# Altium PCB arduino_Uno_Rev3-02-TH_2022-03-31.pcbdoc (part 1 of 2)
Units mil, origin at the board's own origin, x right, y up, seen from the top; angles counter-clockwise.
Board outline 5460.48 x 4115 mil, 2 copper layers (Top Layer, Bottom Layer); 53 components, 61 nets, 247 pads, 72 vias.
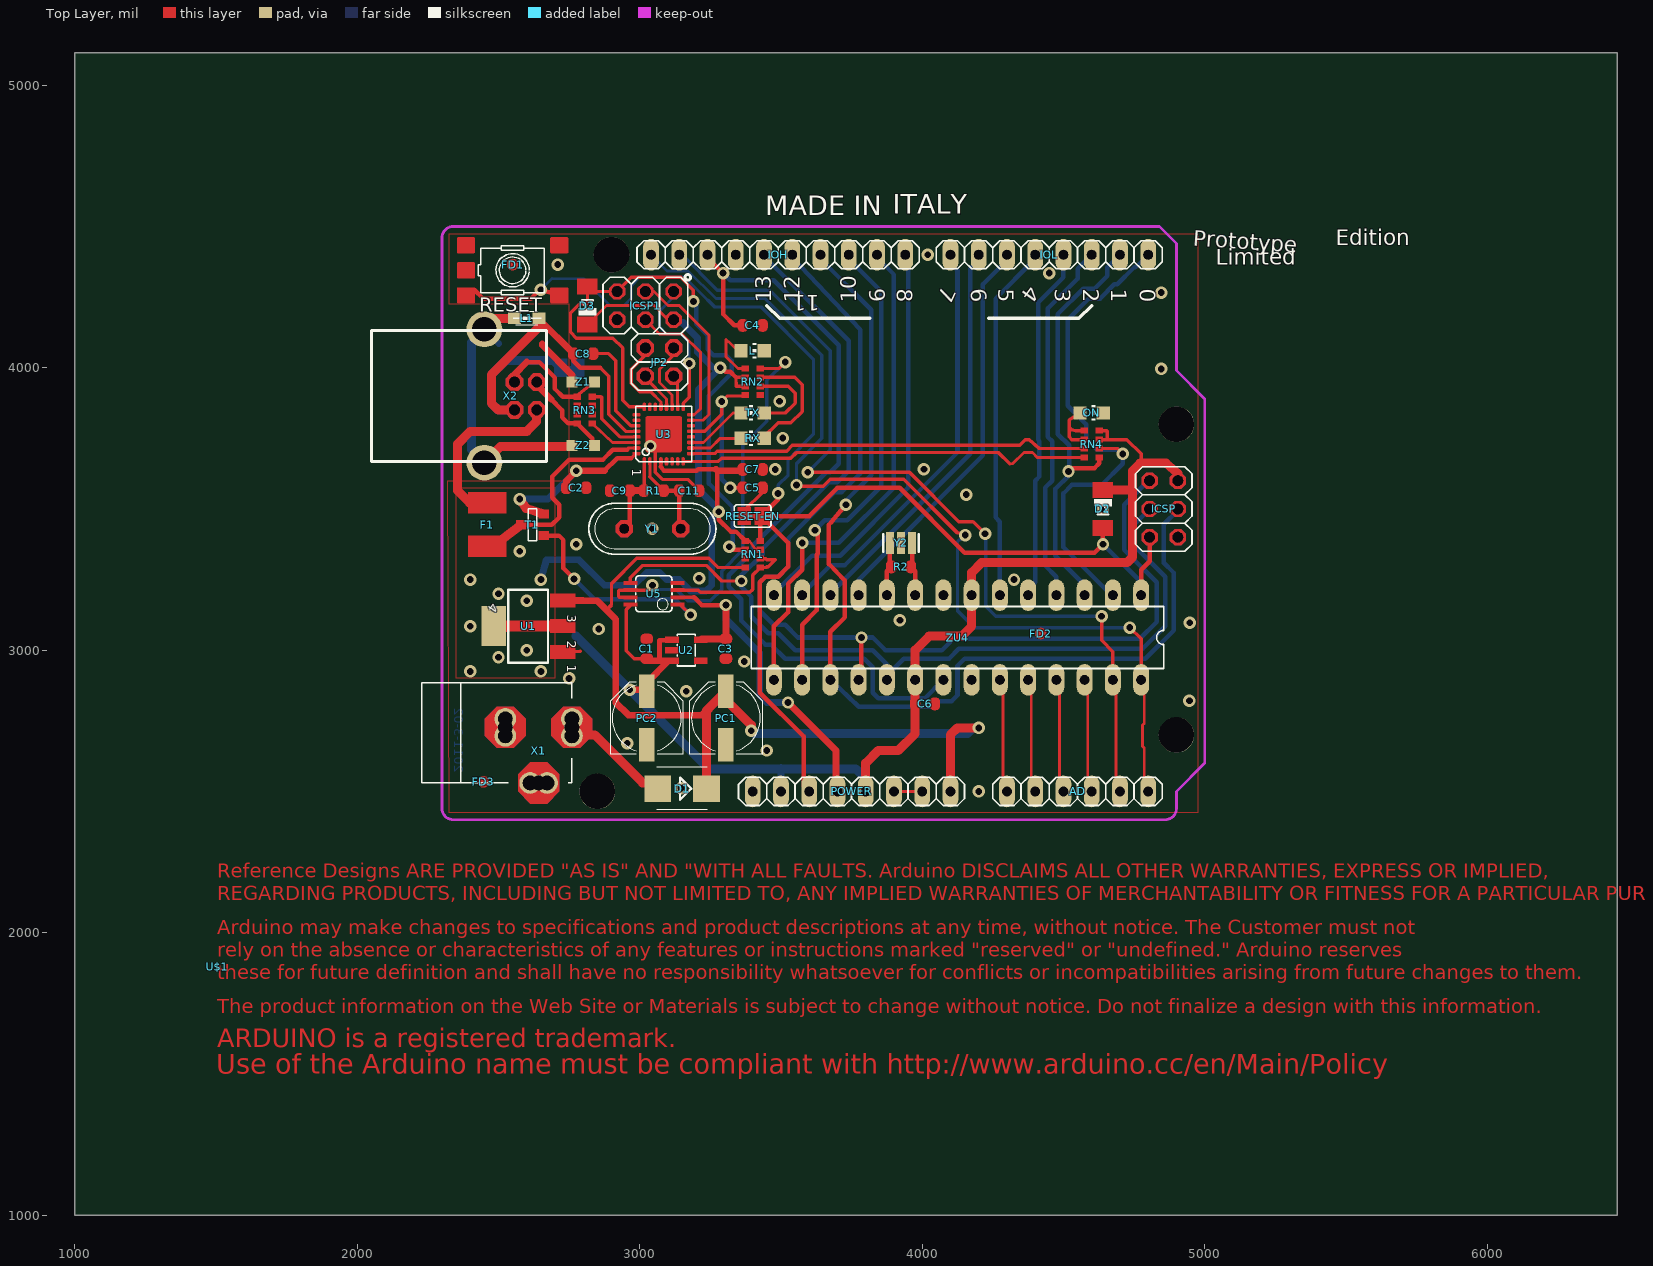
[diagram p0: Top Layer view]
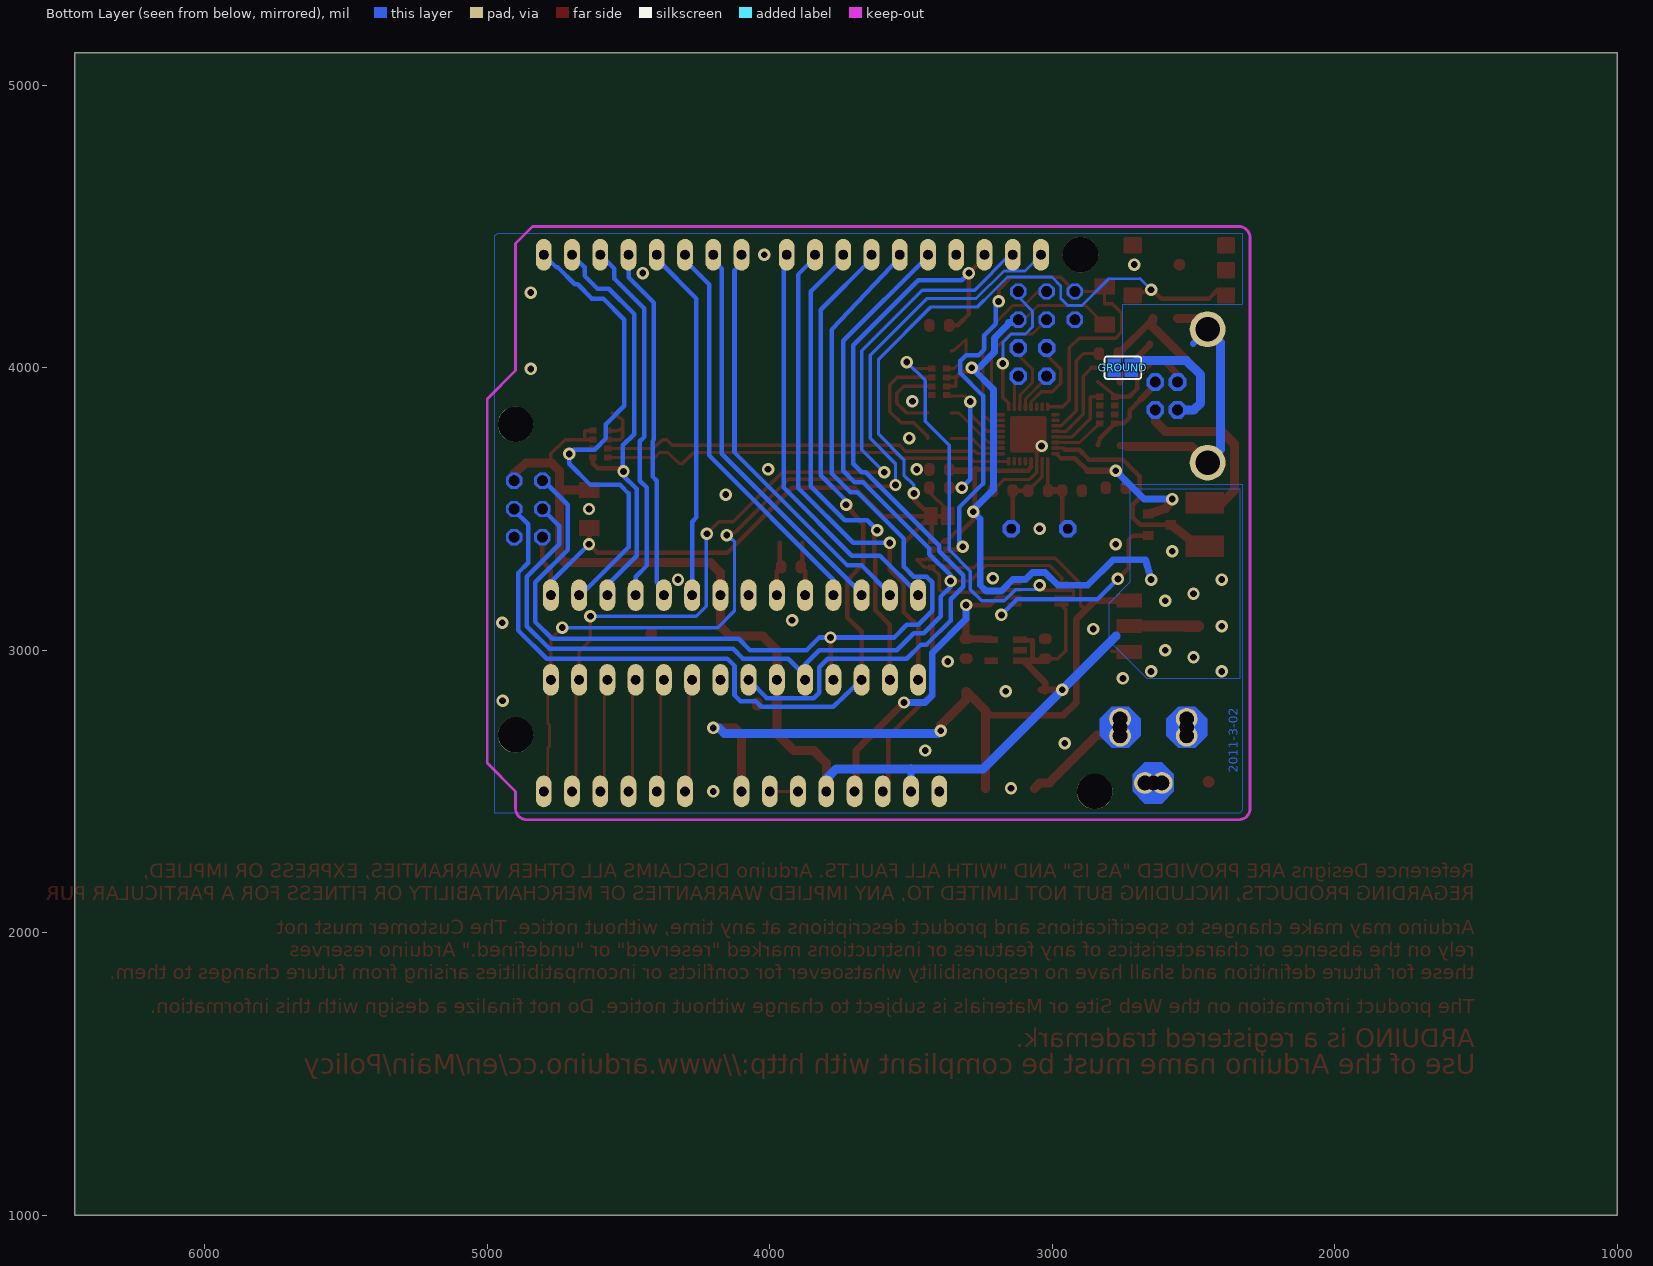
[diagram p1: Bottom Layer view, seen from below]

## Layer stack, top to bottom
Top Layer: signal copper (thickness not stored)
Dielectric: dielectric 12.6, FR-4, Dk 4.8
Bottom Layer: signal copper (thickness not stored)

## Board outline
6460.48,1000 1000,1000 1000,5115 6460.48,5115

## Components (designator, comment, footprint, x,y, rotation, side; value= is the part's Value field where it differs from the comment)
AD "6x1F-H8.5" 1X06 4550,2500 r0 top
C1 "100n" C0603-ROUND 3025,3005 r270 top
C2 "100n" C0603-ROUND 2775,3575 r180 top
C3 "1u" C0603-ROUND 3305,3005 r90 top
C4 "100n" C0603-ROUND 3400,4150 r180 top
C5 "100n" C0603-ROUND 3400,3575 r0 top
C6 "100n" C0603-ROUND 4010,2810 r180 top
C7 "100n" C0603-ROUND 3400,3640 r0 top
C8 "1u" C0603-ROUND 2800,4050 r180 top
C9 "22p" C0603-ROUND 2930,3565 r180 top
C11 "22p" C0603-ROUND 3175,3565 r0 top
D1 "M7" SMB 3150,2510 r180 top
D2 "CD1206-S01575" MINIMELF 4640,3500 r270 top
D3 "CD1206-S01575" MINIMELF 2815,4220 r90 top
F1 "MF-MSMF050-2 500mA" L1812 2460,3445 r90 top
FD1 "FIDUCIALMOUNT" FIDUCIA-MOUNT 2550,4365 r0 top
FD2 "FIDUCIALMOUNT" FIDUCIA-MOUNT 4419.68,3059.09 r0 top
FD3 "FIDUCIALMOUNT" FIDUCIA-MOUNT 2446.85,2534.25 r0 top
GROUND "_" SJ 2750,4000 r180 bottom
ICSP "3x2 M" 2X03 4854.99,3500 r270 top
ICSP1 "3x2 M" 2X03 3020,4220 r180 top
IOH "10x1F-H8.5" 1X10 3490,4400 r180 top
IOL "8x1F-H8.5" 1X08 4450,4400 r180 top
JP2 "2x2 M - NM" 2X02 3070,4020 r90 top
L "YELLOW" CHIP-LED0805 3400,4060 r270 top
L1 "BLM21" 0805 2600,4175 r180 top
ON "GREEN" CHIP-LED0805 4600,3840 r270 top
PC1 "47u" PANASONIC_D 3305,2760 r90 top
PC2 "47u" PANASONIC_D 3025,2760 r90 top
POWER "8x1F-H8.5" 1X08 3750,2500 r0 top
R1 "1M" R0603-ROUND 3050,3565 r0 top
R2 "1M" R0603-ROUND 3925,3295 r180 top
RESET "TS42031-160R-TR-7260" TS42 2550,4345 r0 top
RESET-EN "_" SJ 3400,3475 r0 top
RN1 "10K" CAY16 3400,3340 r90 top
RN2 "1K" CAY16 3400,3950 r270 top
RN3 "22R" CAY16 2805,3850 r90 top
RN4 "1K" CAY16 4600,3730 r90 top
RX "YELLOW" CHIP-LED0805 3400,3750 r90 top
T1 "FDN340P" SOT-23 2620,3445 r270 top
TX "YELLOW" CHIP-LED0805 3400,3840 r90 top
U1 "NCP1117ST50T3G" SOT223 2605,3085 r90 top
U2 "LP2985-33DBVR" SOT23-DBV 3165,3000 r270 top
U3 "ATMEGA16U2-MU(R)" MLF32 3085,3765 r90 top
U5 "LMV358IDGKR" MSOP08 3050,3200 r90 top
U$1 "DISCLAIMER" DISCLAIMER 1505,1880 r0 top
X1 "POWERSUPPLY_DC21MMX" POWERSUPPLY_DC-21MM 2510,2730 r90 top
X2 "USB-B_TH" PN61729 2450,3900 r270 top
Y1 "16MHz" QS 3045,3430 r180 top
Y2 "CSTCE16M0V53-R0 16MHZ" RESONATOR 3925,3380 r0 top
Z1 "CG0603MLC-05E" CT/CN0603 2800,3950 r180 top
Z2 "CG0603MLC-05E" CT/CN0603 2800,3725 r180 top
ZU4 "ATMEGA328P-PU" DIL28-3 4125,3045 r180 top

## Footprints (in the part's own frame and the unit in brackets; to place one, negate y for a bottom-side part, rotate by r counter-clockwise, add the part's x,y. Pads: shape width x height; smd on the part's side, far side on the other; paste and mask are expansions set on the pad)
1X06 [mil]
  oval 56x112 hole 33.46 slot 33.66 at 90 deg: 1(-250,0) 2(-150,0) 3(-50,0) 4(50,0) 5(150,0) 6(250,0)
  silkscreen extent -300,-50 300,50
1X08 [mil]
  oval 56x112 hole 33.46 slot 33.66 at 90 deg: 1(-350,0) 2(-250,0) 3(-150,0) 4(-50,0) 5(50,0) 6(150,0) 7(250,0) 8(350,0)
  silkscreen extent -400,-50 400,50
1X10 [mil]
  oval 56x112 hole 33.46 slot 33.66 at 90 deg: 1(-450,0) 2(-350,0) 3(-250,0) 4(-150,0) 5(-50,0) 6(50,0) 7(150,0) 8(250,0) 9(350,0) 10(450,0)
  silkscreen extent -500,-50 500,50
2X02 [mil]
  round 0 hole 37.4 slot 37.6 at 0 deg: 1(-50,-50) 2(-50,50) 3(50,-50) 4(50,50)
  Top Layer region: -19.5,-37.4 -37.4,-19.5 -62.6,-19.5 -80.5,-37.4 -80.5,-62.6 -62.6,-80.5 -37.4,-80.5 -19.5,-62.6
  Top Layer region: -19.5,62.6 -37.4,80.5 -62.6,80.5 -80.5,62.6 -80.5,37.4 -62.6,19.5 -37.4,19.5 -19.5,37.4
  Top Layer region: 80.5,-37.4 62.6,-19.5 37.4,-19.5 19.5,-37.4 19.5,-62.6 37.4,-80.5 62.6,-80.5 80.5,-62.6
  Top Layer region: 80.5,62.6 62.6,80.5 37.4,80.5 19.5,62.6 19.5,37.4 37.4,19.5 62.6,19.5 80.5,37.4
  Bottom Layer region: -19.5,-37.4 -37.4,-19.5 -62.6,-19.5 -80.5,-37.4 -80.5,-62.6 -62.6,-80.5 -37.4,-80.5 -19.5,-62.6
  Bottom Layer region: -19.5,62.6 -37.4,80.5 -62.6,80.5 -80.5,62.6 -80.5,37.4 -62.6,19.5 -37.4,19.5 -19.5,37.4
  Bottom Layer region: 80.5,-37.4 62.6,-19.5 37.4,-19.5 19.5,-37.4 19.5,-62.6 37.4,-80.5 62.6,-80.5 80.5,-62.6
  Bottom Layer region: 80.5,62.6 62.6,80.5 37.4,80.5 19.5,62.6 19.5,37.4 37.4,19.5 62.6,19.5 80.5,37.4
  silkscreen extent -100,-100 100,100
2X03 [mil]
  round 0 hole 37.4 slot 37.6 at 0 deg: 1(-100,-49.99) 2(-100,50.01) 3(0,-49.99) 4(0,50.01) 5(100,-49.99) 6(100,50.01)
  Top Layer region: -71.8,-38.29 -88.3,-21.79 -111.7,-21.79 -128.2,-38.29 -128.2,-61.69 -111.7,-78.19 -88.3,-78.19 -71.8,-61.69
  Top Layer region: -71.8,61.71 -88.3,78.21 -111.7,78.21 -128.2,61.71 -128.2,38.31 -111.7,21.81 -88.3,21.81 -71.8,38.31
  Top Layer region: 28.2,-38.29 11.7,-21.79 -11.7,-21.79 -28.2,-38.29 -28.2,-61.69 -11.7,-78.19 11.7,-78.19 28.2,-61.69
  Top Layer region: 28.2,61.71 11.7,78.21 -11.7,78.21 -28.2,61.71 -28.2,38.31 -11.7,21.81 11.7,21.81 28.2,38.31
  Top Layer region: 128.2,-38.29 111.7,-21.79 88.3,-21.79 71.8,-38.29 71.8,-61.69 88.3,-78.19 111.7,-78.19 128.2,-61.69
  Top Layer region: 128.2,61.71 111.7,78.21 88.3,78.21 71.8,61.71 71.8,38.31 88.3,21.81 111.7,21.81 128.2,38.31
  Bottom Layer region: -71.8,-38.29 -88.3,-21.79 -111.7,-21.79 -128.2,-38.29 -128.2,-61.69 -111.7,-78.19 -88.3,-78.19 -71.8,-61.69
  Bottom Layer region: -71.8,61.71 -88.3,78.21 -111.7,78.21 -128.2,61.71 -128.2,38.31 -111.7,21.81 -88.3,21.81 -71.8,38.31
  Bottom Layer region: 28.2,-38.29 11.7,-21.79 -11.7,-21.79 -28.2,-38.29 -28.2,-61.69 -11.7,-78.19 11.7,-78.19 28.2,-61.69
  Bottom Layer region: 28.2,61.71 11.7,78.21 -11.7,78.21 -28.2,61.71 -28.2,38.31 -11.7,21.81 11.7,21.81 28.2,38.31
  Bottom Layer region: 128.2,-38.29 111.7,-21.79 88.3,-21.79 71.8,-38.29 71.8,-61.69 88.3,-78.19 111.7,-78.19 128.2,-61.69
  Bottom Layer region: 128.2,61.71 111.7,78.21 88.3,78.21 71.8,61.71 71.8,38.31 88.3,21.81 111.7,21.81 128.2,38.31
  silkscreen extent -150,-100 150,100
0805 [mm]
  rect 1.2x1 smd: 1(-1.1,0) 2(1.1,0)
  silkscreen extent -1.3,-0.62 1.2,0.62
C0603-ROUND [mil]
  round 0 smd: 1(-35,0) 2(35,0)
  Top Layer region: -38.5,-21.6 -40.2,-21.5 -41.9,-21.2 -43.5,-20.7 -45.1,-20 -46.6,-19.1 -47.9,-18.1 -49.1,-16.9 -50.2,-15.5 -51.1,-14.1 -51.8,-12.5 -52.3,-10.9 -52.6,-9.2 -52.7,-7.5 -52.7,7.5 -52.6,9.2 -52.3,10.9 -51.8,12.5 -51.1,14.1 -50.2,15.5 -49.1,16.9 -47.9,18.1 -46.6,19.2 -45.1,20 -43.5,20.7 -41.9,21.2 -40.2,21.6 -38.5,21.7 -31.5,21.7 -29.8,21.6 -28.1,21.2 -26.4,20.7 -24.9,20 -23.4,19.2 -22.1,18.1 -20.9,16.9 -19.8,15.5 -18.9,14.1 -18.2,12.5 -17.7,10.9 -17.4,9.2 -17.3,7.5 -17.3,-7.5 -17.4,-9.2 -17.7,-10.9 -18.2,-12.5 -18.9,-14.1 -19.8,-15.5 -20.9,-16.9 -22.1,-18.1 -23.4,-19.1 -24.9,-20 -26.4,-20.7 -28.1,-21.2 -29.8,-21.5 -31.5,-21.6
  Top Layer region: 31.5,-21.6 29.8,-21.5 28.1,-21.2 26.5,-20.7 24.9,-20 23.4,-19.1 22.1,-18.1 20.9,-16.9 19.8,-15.5 18.9,-14.1 18.2,-12.5 17.7,-10.9 17.4,-9.2 17.3,-7.5 17.3,7.5 17.4,9.2 17.7,10.9 18.2,12.5 18.9,14.1 19.8,15.5 20.9,16.9 22.1,18.1 23.4,19.2 24.9,20 26.5,20.7 28.1,21.2 29.8,21.6 31.5,21.7 38.5,21.7 40.2,21.6 41.9,21.2 43.6,20.7 45.1,20 46.6,19.2 47.9,18.1 49.1,16.9 50.2,15.5 51.1,14.1 51.8,12.5 52.3,10.9 52.6,9.2 52.7,7.5 52.7,-7.5 52.6,-9.2 52.3,-10.9 51.8,-12.5 51.1,-14.1 50.2,-15.5 49.1,-16.9 47.9,-18.1 46.6,-19.1 45.1,-20 43.6,-20.7 41.9,-21.2 40.2,-21.5 38.5,-21.6
CAY16 [mil]
  round 0 smd: 1(-47.25,-26.57) 2(-15.75,-26.57) 3(15.75,-26.57) 4(47.24,-26.57) 5(47.24,26.58) 6(15.75,26.58) 7(-15.75,26.58) 8(-47.25,26.58)
  Top Layer region: -57.1,-13.8 -37.4,-13.8 -37.4,-39.4 -57.1,-39.4
  Top Layer region: -25.6,-13.8 -5.9,-13.8 -5.9,-39.4 -25.6,-39.4
  Top Layer region: 5.9,-13.8 25.6,-13.8 25.6,-39.4 5.9,-39.4
  Top Layer region: 37.4,-13.8 57.1,-13.8 57.1,-39.4 37.4,-39.4
  Top Layer region: 37.4,39.4 57.1,39.4 57.1,13.8 37.4,13.8
  Top Layer region: 5.9,39.4 25.6,39.4 25.6,13.8 5.9,13.8
  Top Layer region: -25.6,39.4 -5.9,39.4 -5.9,13.8 -25.6,13.8
  Top Layer region: -57.1,39.4 -37.4,39.4 -37.4,13.8 -57.1,13.8
CHIP-LED0805 [mil]
  rect 47.24x47.24 smd: A(0,-41.34) C(0,41.34)
  silkscreen extent -27,0 27,12
CT/CN0603 [mm]
  rect 1x1 smd: 1(-1,0) 2(1,0)
DIL28-3 [mil]
  oval 56x112 hole 33.46 slot 33.66 at 90 deg: 1(-650,-150) 2(-550,-150) 3(-450,-150) 4(-350,-150) 5(-250,-150) 6(-150,-150) 7(-50,-150) 8(50,-150) 9(150,-150) 10(250,-150) 11(350,-150) 12(450,-150) 13(550,-150) 14(650,-150) 15(650,150) 16(550,150) 17(450,150) 18(350,150) 19(250,150) 20(150,150) 21(50,150) 22(-50,150) 23(-150,150) 24(-250,150) 25(-350,150) 26(-450,150) 27(-550,150) 28(-650,150)
  silkscreen extent -730,-110 730,110
DISCLAIMER [mil]
FIDUCIA-MOUNT [mil]
  round 0 smd: P$1(0,0)
  Top Layer region: -20,0 -19.8,2.4 -19.4,4.8 -18.7,7.1 -17.7,9.3 -16.5,11.4 -15,13.3 -13.3,15 -11.4,16.5 -9.3,17.7 -7.1,18.7 -4.8,19.4 -2.4,19.8 0,20 0,20 2.4,19.8 4.8,19.4 7.1,18.7 9.3,17.7 11.4,16.5 13.3,15 15,13.3 16.5,11.4 17.7,9.3 18.7,7.1 19.4,4.8 19.9,2.4 20,0 20,0 19.9,-2.4 19.4,-4.8 18.7,-7.1 17.7,-9.3 16.5,-11.4 15,-13.3 13.3,-15 11.4,-16.5 9.3,-17.7 7.1,-18.7 4.8,-19.4 2.4,-19.9 0,-20 0,-20 -2.4,-19.9 -4.8,-19.4 -7.1,-18.7 -9.3,-17.7 -11.4,-16.5 -13.3,-15 -15,-13.3 -16.5,-11.4 -17.7,-9.3 -18.7,-7.1 -19.4,-4.8 -19.8,-2.4
L1812 [mil]
  round 0 smd: 1(-76.77,0) 2(76.77,0)
  Top Layer region: -114.2,66.9 -39.4,66.9 -39.4,-66.9 -114.2,-66.9
  Top Layer region: 39.4,66.9 114.2,66.9 114.2,-66.9 39.4,-66.9
MINIMELF [mil]
  round 0 smd: A(66.93,0) C(-66.93,0)
  Top Layer region: -94.5,35.4 -39.4,35.4 -39.4,-35.4 -94.5,-35.4
  Top Layer region: 39.4,35.4 94.5,35.4 94.5,-35.4 39.4,-35.4
  silkscreen extent -34,-31 20,31
MLF32 [mil]
  round 0 smd: 1(-96.46,68.9) 2(-96.46,49.21) 3(-96.46,29.53) 4(-96.46,9.84) 5(-96.46,-9.84) 6(-96.46,-29.53) 7(-96.46,-49.21) 8(-96.46,-68.9) 9(-68.9,-96.45) 10(-49.22,-96.45) 11(-29.53,-96.45) 12(-9.85,-96.45) 13(9.84,-96.45) 14(29.52,-96.45) 15(49.21,-96.45) 16(68.89,-96.45) 17(96.45,-68.9) 18(96.45,-49.21) 19(96.45,-29.53) 20(96.45,-9.84) 21(96.45,9.84) 22(96.45,29.53) 23(96.45,49.21) 24(96.45,68.9) 25(68.89,96.46) 26(49.21,96.46) 27(29.52,96.46) 28(9.84,96.46) 29(-9.85,96.46) 30(-29.53,96.46) 31(-49.22,96.46) 32(-68.9,96.46) 33(0,0)
  Top Layer region: -105.8,63.4 -106.4,63.4 -106.9,63.5 -107.4,63.7 -107.9,63.9 -108.3,64.2 -108.8,64.5 -109.1,64.9 -109.5,65.3 -109.7,65.7 -110,66.2 -110.1,66.7 -110.2,67.3 -110.2,67.8 -110.2,70 -110.2,70.5 -110.1,71.1 -110,71.6 -109.7,72 -109.5,72.5 -109.1,72.9 -108.8,73.3 -108.3,73.6 -107.9,73.9 -107.4,74.1 -106.9,74.3 -106.4,74.4 -105.8,74.4 -87.1,74.4 -86.6,74.4 -86,74.3 -85.5,74.1 -85,73.9 -84.6,73.6 -84.2,73.3 -83.8,72.9 -83.5,72.5 -83.2,72 -83,71.6 -82.8,71.1 -82.7,70.5 -82.7,70 -82.7,67.8 -82.7,67.3 -82.8,66.7 -83,66.2 -83.2,65.7 -83.5,65.3 -83.8,64.9 -84.2,64.5 -84.6,64.2 -85,63.9 -85.5,63.7 -86,63.5 -86.6,63.4 -87.1,63.4
  Top Layer region: -105.8,43.7 -106.4,43.7 -106.9,43.8 -107.4,44 -107.9,44.2 -108.3,44.5 -108.8,44.8 -109.1,45.2 -109.5,45.6 -109.7,46.1 -110,46.5 -110.1,47.1 -110.2,47.6 -110.2,48.1 -110.2,50.3 -110.2,50.8 -110.1,51.4 -110,51.9 -109.7,52.4 -109.5,52.8 -109.1,53.2 -108.8,53.6 -108.3,53.9 -107.9,54.2 -107.4,54.4 -106.9,54.6 -106.4,54.7 -105.8,54.7 -87.1,54.7 -86.6,54.7 -86,54.6 -85.5,54.4 -85,54.2 -84.6,53.9 -84.2,53.6 -83.8,53.2 -83.5,52.8 -83.2,52.4 -83,51.9 -82.8,51.4 -82.7,50.8 -82.7,50.3 -82.7,48.1 -82.7,47.6 -82.8,47.1 -83,46.5 -83.2,46.1 -83.5,45.6 -83.8,45.2 -84.2,44.8 -84.6,44.5 -85,44.2 -85.5,44 -86,43.8 -86.6,43.7 -87.1,43.7
  Top Layer region: -105.8,24 -106.4,24 -106.9,24.1 -107.4,24.3 -107.9,24.5 -108.3,24.8 -108.8,25.1 -109.1,25.5 -109.5,25.9 -109.7,26.4 -110,26.9 -110.1,27.4 -110.2,27.9 -110.2,28.4 -110.2,30.6 -110.2,31.2 -110.1,31.7 -110,32.2 -109.7,32.7 -109.5,33.1 -109.1,33.6 -108.8,33.9 -108.3,34.3 -107.9,34.5 -107.4,34.7 -106.9,34.9 -106.4,35 -105.8,35 -87.1,35 -86.6,35 -86,34.9 -85.5,34.7 -85,34.5 -84.6,34.3 -84.2,33.9 -83.8,33.6 -83.5,33.1 -83.2,32.7 -83,32.2 -82.8,31.7 -82.7,31.2 -82.7,30.6 -82.7,28.4 -82.7,27.9 -82.8,27.4 -83,26.9 -83.2,26.4 -83.5,25.9 -83.8,25.5 -84.2,25.1 -84.6,24.8 -85,24.5 -85.5,24.3 -86,24.1 -86.6,24 -87.1,24
  Top Layer region: -105.8,4.3 -106.4,4.4 -106.9,4.5 -107.4,4.6 -107.9,4.8 -108.3,5.1 -108.8,5.4 -109.1,5.8 -109.5,6.2 -109.7,6.7 -110,7.2 -110.1,7.7 -110.2,8.2 -110.2,8.7 -110.2,10.9 -110.2,11.5 -110.1,12 -110,12.5 -109.7,13 -109.5,13.4 -109.1,13.9 -108.8,14.2 -108.3,14.6 -107.9,14.8 -107.4,15.1 -106.9,15.2 -106.4,15.3 -105.8,15.4 -87.1,15.4 -86.6,15.3 -86,15.2 -85.5,15.1 -85,14.8 -84.6,14.6 -84.2,14.2 -83.8,13.9 -83.5,13.4 -83.2,13 -83,12.5 -82.8,12 -82.7,11.5 -82.7,10.9 -82.7,8.7 -82.7,8.2 -82.8,7.7 -83,7.2 -83.2,6.7 -83.5,6.2 -83.8,5.8 -84.2,5.4 -84.6,5.1 -85,4.8 -85.5,4.6 -86,4.5 -86.6,4.4 -87.1,4.3
  Top Layer region: -105.8,-15.4 -106.4,-15.3 -106.9,-15.2 -107.4,-15.1 -107.9,-14.9 -108.3,-14.6 -108.8,-14.2 -109.1,-13.9 -109.5,-13.5 -109.7,-13 -110,-12.5 -110.1,-12 -110.2,-11.5 -110.2,-10.9 -110.2,-8.7 -110.2,-8.2 -110.1,-7.7 -110,-7.2 -109.7,-6.7 -109.5,-6.2 -109.1,-5.8 -108.8,-5.4 -108.3,-5.1 -107.9,-4.8 -107.4,-4.6 -106.9,-4.5 -106.4,-4.4 -105.8,-4.3 -87.1,-4.3 -86.6,-4.4 -86,-4.5 -85.5,-4.6 -85,-4.8 -84.6,-5.1 -84.2,-5.4 -83.8,-5.8 -83.5,-6.2 -83.2,-6.7 -83,-7.2 -82.8,-7.7 -82.7,-8.2 -82.7,-8.7 -82.7,-10.9 -82.7,-11.5 -82.8,-12 -83,-12.5 -83.2,-13 -83.5,-13.5 -83.8,-13.9 -84.2,-14.2 -84.6,-14.6 -85,-14.9 -85.5,-15.1 -86,-15.2 -86.6,-15.3 -87.1,-15.4
  Top Layer region: -105.8,-35 -106.4,-35 -106.9,-34.9 -107.4,-34.8 -107.9,-34.5 -108.3,-34.3 -108.8,-33.9 -109.1,-33.6 -109.5,-33.1 -109.7,-32.7 -110,-32.2 -110.1,-31.7 -110.2,-31.2 -110.2,-30.6 -110.2,-28.4 -110.2,-27.9 -110.1,-27.4 -110,-26.9 -109.7,-26.4 -109.5,-25.9 -109.1,-25.5 -108.8,-25.1 -108.3,-24.8 -107.9,-24.5 -107.4,-24.3 -106.9,-24.1 -106.4,-24.1 -105.8,-24 -87.1,-24 -86.6,-24.1 -86,-24.1 -85.5,-24.3 -85,-24.5 -84.6,-24.8 -84.2,-25.1 -83.8,-25.5 -83.5,-25.9 -83.2,-26.4 -83,-26.9 -82.8,-27.4 -82.7,-27.9 -82.7,-28.4 -82.7,-30.6 -82.7,-31.2 -82.8,-31.7 -83,-32.2 -83.2,-32.7 -83.5,-33.1 -83.8,-33.6 -84.2,-33.9 -84.6,-34.3 -85,-34.5 -85.5,-34.8 -86,-34.9 -86.6,-35 -87.1,-35
  Top Layer region: -105.8,-54.7 -106.4,-54.7 -106.9,-54.6 -107.4,-54.4 -107.9,-54.2 -108.3,-53.9 -108.8,-53.6 -109.1,-53.2 -109.5,-52.8 -109.7,-52.4 -110,-51.9 -110.1,-51.4 -110.2,-50.8 -110.2,-50.3 -110.2,-48.1 -110.2,-47.6 -110.1,-47.1 -110,-46.5 -109.7,-46.1 -109.5,-45.6 -109.1,-45.2 -108.8,-44.8 -108.3,-44.5 -107.9,-44.2 -107.4,-44 -106.9,-43.8 -106.4,-43.7 -105.8,-43.7 -87.1,-43.7 -86.6,-43.7 -86,-43.8 -85.5,-44 -85,-44.2 -84.6,-44.5 -84.2,-44.8 -83.8,-45.2 -83.5,-45.6 -83.2,-46.1 -83,-46.5 -82.8,-47.1 -82.7,-47.6 -82.7,-48.1 -82.7,-50.3 -82.7,-50.8 -82.8,-51.4 -83,-51.9 -83.2,-52.4 -83.5,-52.8 -83.8,-53.2 -84.2,-53.6 -84.6,-53.9 -85,-54.2 -85.5,-54.4 -86,-54.6 -86.6,-54.7 -87.1,-54.7
  Top Layer region: -105.8,-74.4 -106.4,-74.4 -106.9,-74.3 -107.4,-74.1 -107.9,-73.9 -108.3,-73.6 -108.8,-73.3 -109.1,-72.9 -109.5,-72.5 -109.7,-72.1 -110,-71.6 -110.1,-71.1 -110.2,-70.5 -110.2,-70 -110.2,-67.8 -110.2,-67.3 -110.1,-66.7 -110,-66.2 -109.7,-65.7 -109.5,-65.3 -109.1,-64.9 -108.8,-64.5 -108.3,-64.2 -107.9,-63.9 -107.4,-63.7 -106.9,-63.5 -106.4,-63.4 -105.8,-63.4 -87.1,-63.4 -86.6,-63.4 -86,-63.5 -85.5,-63.7 -85,-63.9 -84.6,-64.2 -84.2,-64.5 -83.8,-64.9 -83.5,-65.3 -83.2,-65.7 -83,-66.2 -82.8,-66.7 -82.7,-67.3 -82.7,-67.8 -82.7,-70 -82.7,-70.5 -82.8,-71.1 -83,-71.6 -83.2,-72.1 -83.5,-72.5 -83.8,-72.9 -84.2,-73.3 -84.6,-73.6 -85,-73.9 -85.5,-74.1 -86,-74.3 -86.6,-74.4 -87.1,-74.4
  Top Layer region: -63.4,-105.8 -63.4,-106.4 -63.5,-106.9 -63.7,-107.4 -63.9,-107.9 -64.2,-108.3 -64.5,-108.8 -64.9,-109.1 -65.3,-109.5 -65.8,-109.7 -66.2,-110 -66.7,-110.1 -67.3,-110.2 -67.8,-110.2 -70,-110.2 -70.5,-110.2 -71.1,-110.1 -71.6,-110 -72.1,-109.7 -72.5,-109.5 -72.9,-109.1 -73.3,-108.8 -73.6,-108.3 -73.9,-107.9 -74.1,-107.4 -74.3,-106.9 -74.4,-106.4 -74.4,-105.8 -74.4,-87.1 -74.4,-86.6 -74.3,-86 -74.1,-85.5 -73.9,-85 -73.6,-84.6 -73.3,-84.2 -72.9,-83.8 -72.5,-83.5 -72.1,-83.2 -71.6,-83 -71.1,-82.8 -70.5,-82.7 -70,-82.7 -67.8,-82.7 -67.3,-82.7 -66.7,-82.8 -66.2,-83 -65.8,-83.2 -65.3,-83.5 -64.9,-83.8 -64.5,-84.2 -64.2,-84.6 -63.9,-85 -63.7,-85.5 -63.5,-86 -63.4,-86.6 -63.4,-87.1
  Top Layer region: -43.7,-105.8 -43.7,-106.4 -43.8,-106.9 -44,-107.4 -44.2,-107.9 -44.5,-108.3 -44.8,-108.8 -45.2,-109.1 -45.6,-109.5 -46.1,-109.7 -46.6,-110 -47.1,-110.1 -47.6,-110.2 -48.1,-110.2 -50.3,-110.2 -50.9,-110.2 -51.4,-110.1 -51.9,-110 -52.4,-109.7 -52.8,-109.5 -53.2,-109.1 -53.6,-108.8 -54,-108.3 -54.2,-107.9 -54.4,-107.4 -54.6,-106.9 -54.7,-106.4 -54.7,-105.8 -54.7,-87.1 -54.7,-86.6 -54.6,-86 -54.4,-85.5 -54.2,-85 -54,-84.6 -53.6,-84.2 -53.2,-83.8 -52.8,-83.5 -52.4,-83.2 -51.9,-83 -51.4,-82.8 -50.9,-82.7 -50.3,-82.7 -48.1,-82.7 -47.6,-82.7 -47.1,-82.8 -46.6,-83 -46.1,-83.2 -45.6,-83.5 -45.2,-83.8 -44.8,-84.2 -44.5,-84.6 -44.2,-85 -44,-85.5 -43.8,-86 -43.7,-86.6 -43.7,-87.1
  Top Layer region: -24,-105.8 -24.1,-106.4 -24.2,-106.9 -24.3,-107.4 -24.5,-107.9 -24.8,-108.3 -25.1,-108.8 -25.5,-109.1 -25.9,-109.5 -26.4,-109.7 -26.9,-110 -27.4,-110.1 -27.9,-110.2 -28.4,-110.2 -30.6,-110.2 -31.2,-110.2 -31.7,-110.1 -32.2,-110 -32.7,-109.7 -33.1,-109.5 -33.6,-109.1 -33.9,-108.8 -34.3,-108.3 -34.5,-107.9 -34.8,-107.4 -34.9,-106.9 -35,-106.4 -35,-105.8 -35,-87.1 -35,-86.6 -34.9,-86 -34.8,-85.5 -34.5,-85 -34.3,-84.6 -33.9,-84.2 -33.6,-83.8 -33.1,-83.5 -32.7,-83.2 -32.2,-83 -31.7,-82.8 -31.2,-82.7 -30.6,-82.7 -28.4,-82.7 -27.9,-82.7 -27.4,-82.8 -26.9,-83 -26.4,-83.2 -25.9,-83.5 -25.5,-83.8 -25.1,-84.2 -24.8,-84.6 -24.5,-85 -24.3,-85.5 -24.2,-86 -24.1,-86.6 -24,-87.1
  Top Layer region: -4.3,-105.8 -4.4,-106.4 -4.5,-106.9 -4.6,-107.4 -4.8,-107.9 -5.1,-108.3 -5.4,-108.8 -5.8,-109.1 -6.2,-109.5 -6.7,-109.7 -7.2,-110 -7.7,-110.1 -8.2,-110.2 -8.7,-110.2 -11,-110.2 -11.5,-110.2 -12,-110.1 -12.5,-110 -13,-109.7 -13.5,-109.5 -13.9,-109.1 -14.3,-108.8 -14.6,-108.3 -14.9,-107.9 -15.1,-107.4 -15.2,-106.9 -15.3,-106.4 -15.4,-105.8 -15.4,-87.1 -15.3,-86.6 -15.2,-86 -15.1,-85.5 -14.9,-85 -14.6,-84.6 -14.3,-84.2 -13.9,-83.8 -13.5,-83.5 -13,-83.2 -12.5,-83 -12,-82.8 -11.5,-82.7 -11,-82.7 -8.7,-82.7 -8.2,-82.7 -7.7,-82.8 -7.2,-83 -6.7,-83.2 -6.2,-83.5 -5.8,-83.8 -5.4,-84.2 -5.1,-84.6 -4.8,-85 -4.6,-85.5 -4.5,-86 -4.4,-86.6 -4.3,-87.1
  Top Layer region: 15.3,-105.8 15.3,-106.4 15.2,-106.9 15.1,-107.4 14.8,-107.9 14.6,-108.3 14.2,-108.8 13.9,-109.1 13.4,-109.5 13,-109.7 12.5,-110 12,-110.1 11.5,-110.2 10.9,-110.2 8.7,-110.2 8.2,-110.2 7.7,-110.1 7.2,-110 6.7,-109.7 6.2,-109.5 5.8,-109.1 5.4,-108.8 5.1,-108.3 4.8,-107.9 4.6,-107.4 4.5,-106.9 4.4,-106.4 4.3,-105.8 4.3,-87.1 4.4,-86.6 4.5,-86 4.6,-85.5 4.8,-85 5.1,-84.6 5.4,-84.2 5.8,-83.8 6.2,-83.5 6.7,-83.2 7.2,-83 7.7,-82.8 8.2,-82.7 8.7,-82.7 10.9,-82.7 11.5,-82.7 12,-82.8 12.5,-83 13,-83.2 13.4,-83.5 13.9,-83.8 14.2,-84.2 14.6,-84.6 14.8,-85 15.1,-85.5 15.2,-86 15.3,-86.6 15.3,-87.1
  Top Layer region: 35,-105.8 35,-106.4 34.9,-106.9 34.7,-107.4 34.5,-107.9 34.3,-108.3 33.9,-108.8 33.5,-109.1 33.1,-109.5 32.7,-109.7 32.2,-110 31.7,-110.1 31.2,-110.2 30.6,-110.2 28.4,-110.2 27.9,-110.2 27.4,-110.1 26.9,-110 26.4,-109.7 25.9,-109.5 25.5,-109.1 25.1,-108.8 24.8,-108.3 24.5,-107.9 24.3,-107.4 24.1,-106.9 24,-106.4 24,-105.8 24,-87.1 24,-86.6 24.1,-86 24.3,-85.5 24.5,-85 24.8,-84.6 25.1,-84.2 25.5,-83.8 25.9,-83.5 26.4,-83.2 26.9,-83 27.4,-82.8 27.9,-82.7 28.4,-82.7 30.6,-82.7 31.2,-82.7 31.7,-82.8 32.2,-83 32.7,-83.2 33.1,-83.5 33.5,-83.8 33.9,-84.2 34.3,-84.6 34.5,-85 34.7,-85.5 34.9,-86 35,-86.6 35,-87.1
  Top Layer region: 54.7,-105.8 54.7,-106.4 54.6,-106.9 54.4,-107.4 54.2,-107.9 53.9,-108.3 53.6,-108.8 53.2,-109.1 52.8,-109.5 52.4,-109.7 51.9,-110 51.4,-110.1 50.8,-110.2 50.3,-110.2 48.1,-110.2 47.6,-110.2 47,-110.1 46.5,-110 46.1,-109.7 45.6,-109.5 45.2,-109.1 44.8,-108.8 44.5,-108.3 44.2,-107.9 44,-107.4 43.8,-106.9 43.7,-106.4 43.7,-105.8 43.7,-87.1 43.7,-86.6 43.8,-86 44,-85.5 44.2,-85 44.5,-84.6 44.8,-84.2 45.2,-83.8 45.6,-83.5 46.1,-83.2 46.5,-83 47,-82.8 47.6,-82.7 48.1,-82.7 50.3,-82.7 50.8,-82.7 51.4,-82.8 51.9,-83 52.4,-83.2 52.8,-83.5 53.2,-83.8 53.6,-84.2 53.9,-84.6 54.2,-85 54.4,-85.5 54.6,-86 54.7,-86.6 54.7,-87.1
  Top Layer region: 74.4,-105.8 74.4,-106.4 74.3,-106.9 74.1,-107.4 73.9,-107.9 73.6,-108.3 73.3,-108.8 72.9,-109.1 72.5,-109.5 72,-109.7 71.6,-110 71,-110.1 70.5,-110.2 70,-110.2 67.8,-110.2 67.3,-110.2 66.7,-110.1 66.2,-110 65.7,-109.7 65.3,-109.5 64.9,-109.1 64.5,-108.8 64.2,-108.3 63.9,-107.9 63.7,-107.4 63.5,-106.9 63.4,-106.4 63.4,-105.8 63.4,-87.1 63.4,-86.6 63.5,-86 63.7,-85.5 63.9,-85 64.2,-84.6 64.5,-84.2 64.9,-83.8 65.3,-83.5 65.7,-83.2 66.2,-83 66.7,-82.8 67.3,-82.7 67.8,-82.7 70,-82.7 70.5,-82.7 71,-82.8 71.6,-83 72,-83.2 72.5,-83.5 72.9,-83.8 73.3,-84.2 73.6,-84.6 73.9,-85 74.1,-85.5 74.3,-86 74.4,-86.6 74.4,-87.1
  Top Layer region: 87.1,-74.4 86.5,-74.4 86,-74.3 85.5,-74.1 85,-73.9 84.6,-73.6 84.2,-73.3 83.8,-72.9 83.4,-72.5 83.2,-72.1 83,-71.6 82.8,-71.1 82.7,-70.5 82.7,-70 82.7,-67.8 82.7,-67.3 82.8,-66.7 83,-66.2 83.2,-65.7 83.4,-65.3 83.8,-64.9 84.2,-64.5 84.6,-64.2 85,-63.9 85.5,-63.7 86,-63.5 86.5,-63.4 87.1,-63.4 105.8,-63.4 106.4,-63.4 106.9,-63.5 107.4,-63.7 107.9,-63.9 108.3,-64.2 108.7,-64.5 109.1,-64.9 109.4,-65.3 109.7,-65.7 109.9,-66.2 110.1,-66.7 110.2,-67.3 110.2,-67.8 110.2,-70 110.2,-70.5 110.1,-71.1 109.9,-71.6 109.7,-72.1 109.4,-72.5 109.1,-72.9 108.7,-73.3 108.3,-73.6 107.9,-73.9 107.4,-74.1 106.9,-74.3 106.4,-74.4 105.8,-74.4
  Top Layer region: 87.1,-54.7 86.5,-54.7 86,-54.6 85.5,-54.4 85,-54.2 84.6,-53.9 84.2,-53.6 83.8,-53.2 83.4,-52.8 83.2,-52.4 83,-51.9 82.8,-51.4 82.7,-50.8 82.7,-50.3 82.7,-48.1 82.7,-47.6 82.8,-47.1 83,-46.5 83.2,-46.1 83.4,-45.6 83.8,-45.2 84.2,-44.8 84.6,-44.5 85,-44.2 85.5,-44 86,-43.8 86.5,-43.7 87.1,-43.7 105.8,-43.7 106.4,-43.7 106.9,-43.8 107.4,-44 107.9,-44.2 108.3,-44.5 108.7,-44.8 109.1,-45.2 109.4,-45.6 109.7,-46.1 109.9,-46.5 110.1,-47.1 110.2,-47.6 110.2,-48.1 110.2,-50.3 110.2,-50.8 110.1,-51.4 109.9,-51.9 109.7,-52.4 109.4,-52.8 109.1,-53.2 108.7,-53.6 108.3,-53.9 107.9,-54.2 107.4,-54.4 106.9,-54.6 106.4,-54.7 105.8,-54.7
  Top Layer region: 87.1,-35 86.5,-35 86,-34.9 85.5,-34.8 85,-34.5 84.6,-34.3 84.2,-33.9 83.8,-33.6 83.4,-33.1 83.2,-32.7 83,-32.2 82.8,-31.7 82.7,-31.2 82.7,-30.6 82.7,-28.4 82.7,-27.9 82.8,-27.4 83,-26.9 83.2,-26.4 83.4,-25.9 83.8,-25.5 84.2,-25.1 84.6,-24.8 85,-24.5 85.5,-24.3 86,-24.1 86.5,-24.1 87.1,-24 105.8,-24 106.4,-24.1 106.9,-24.1 107.4,-24.3 107.9,-24.5 108.3,-24.8 108.7,-25.1 109.1,-25.5 109.4,-25.9 109.7,-26.4 109.9,-26.9 110.1,-27.4 110.2,-27.9 110.2,-28.4 110.2,-30.6 110.2,-31.2 110.1,-31.7 109.9,-32.2 109.7,-32.7 109.4,-33.1 109.1,-33.6 108.7,-33.9 108.3,-34.3 107.9,-34.5 107.4,-34.8 106.9,-34.9 106.4,-35 105.8,-35
  Top Layer region: 87.1,-15.4 86.5,-15.3 86,-15.2 85.5,-15.1 85,-14.9 84.6,-14.6 84.2,-14.2 83.8,-13.9 83.4,-13.5 83.2,-13 83,-12.5 82.8,-12 82.7,-11.5 82.7,-10.9 82.7,-8.7 82.7,-8.2 82.8,-7.7 83,-7.2 83.2,-6.7 83.4,-6.2 83.8,-5.8 84.2,-5.4 84.6,-5.1 85,-4.8 85.5,-4.6 86,-4.5 86.5,-4.4 87.1,-4.3 105.8,-4.3 106.4,-4.4 106.9,-4.5 107.4,-4.6 107.9,-4.8 108.3,-5.1 108.7,-5.4 109.1,-5.8 109.4,-6.2 109.7,-6.7 109.9,-7.2 110.1,-7.7 110.2,-8.2 110.2,-8.7 110.2,-10.9 110.2,-11.5 110.1,-12 109.9,-12.5 109.7,-13 109.4,-13.5 109.1,-13.9 108.7,-14.2 108.3,-14.6 107.9,-14.9 107.4,-15.1 106.9,-15.2 106.4,-15.3 105.8,-15.4
  Top Layer region: 87.1,4.3 86.5,4.4 86,4.5 85.5,4.6 85,4.8 84.6,5.1 84.2,5.4 83.8,5.8 83.4,6.2 83.2,6.7 83,7.2 82.8,7.7 82.7,8.2 82.7,8.7 82.7,10.9 82.7,11.5 82.8,12 83,12.5 83.2,13 83.4,13.4 83.8,13.9 84.2,14.2 84.6,14.6 85,14.8 85.5,15.1 86,15.2 86.5,15.3 87.1,15.4 105.8,15.4 106.4,15.3 106.9,15.2 107.4,15.1 107.9,14.8 108.3,14.6 108.7,14.2 109.1,13.9 109.4,13.4 109.7,13 109.9,12.5 110.1,12 110.2,11.5 110.2,10.9 110.2,8.7 110.2,8.2 110.1,7.7 109.9,7.2 109.7,6.7 109.4,6.2 109.1,5.8 108.7,5.4 108.3,5.1 107.9,4.8 107.4,4.6 106.9,4.5 106.4,4.4 105.8,4.3
  Top Layer region: 87.1,24 86.5,24 86,24.1 85.5,24.3 85,24.5 84.6,24.8 84.2,25.1 83.8,25.5 83.4,25.9 83.2,26.4 83,26.9 82.8,27.4 82.7,27.9 82.7,28.4 82.7,30.6 82.7,31.2 82.8,31.7 83,32.2 83.2,32.7 83.4,33.1 83.8,33.6 84.2,33.9 84.6,34.3 85,34.5 85.5,34.7 86,34.9 86.5,35 87.1,35 105.8,35 106.4,35 106.9,34.9 107.4,34.7 107.9,34.5 108.3,34.3 108.7,33.9 109.1,33.6 109.4,33.1 109.7,32.7 109.9,32.2 110.1,31.7 110.2,31.2 110.2,30.6 110.2,28.4 110.2,27.9 110.1,27.4 109.9,26.9 109.7,26.4 109.4,25.9 109.1,25.5 108.7,25.1 108.3,24.8 107.9,24.5 107.4,24.3 106.9,24.1 106.4,24 105.8,24
  Top Layer region: 87.1,43.7 86.5,43.7 86,43.8 85.5,44 85,44.2 84.6,44.5 84.2,44.8 83.8,45.2 83.4,45.6 83.2,46.1 83,46.5 82.8,47.1 82.7,47.6 82.7,48.1 82.7,50.3 82.7,50.8 82.8,51.4 83,51.9 83.2,52.4 83.4,52.8 83.8,53.2 84.2,53.6 84.6,53.9 85,54.2 85.5,54.4 86,54.6 86.5,54.7 87.1,54.7 105.8,54.7 106.4,54.7 106.9,54.6 107.4,54.4 107.9,54.2 108.3,53.9 108.7,53.6 109.1,53.2 109.4,52.8 109.7,52.4 109.9,51.9 110.1,51.4 110.2,50.8 110.2,50.3 110.2,48.1 110.2,47.6 110.1,47.1 109.9,46.5 109.7,46.1 109.4,45.6 109.1,45.2 108.7,44.8 108.3,44.5 107.9,44.2 107.4,44 106.9,43.8 106.4,43.7 105.8,43.7
  Top Layer region: 87.1,63.4 86.5,63.4 86,63.5 85.5,63.7 85,63.9 84.6,64.2 84.2,64.5 83.8,64.9 83.4,65.3 83.2,65.7 83,66.2 82.8,66.7 82.7,67.3 82.7,67.8 82.7,70 82.7,70.5 82.8,71.1 83,71.6 83.2,72 83.4,72.5 83.8,72.9 84.2,73.3 84.6,73.6 85,73.9 85.5,74.1 86,74.3 86.5,74.4 87.1,74.4 105.8,74.4 106.4,74.4 106.9,74.3 107.4,74.1 107.9,73.9 108.3,73.6 108.7,73.3 109.1,72.9 109.4,72.5 109.7,72 109.9,71.6 110.1,71.1 110.2,70.5 110.2,70 110.2,67.8 110.2,67.3 110.1,66.7 109.9,66.2 109.7,65.7 109.4,65.3 109.1,64.9 108.7,64.5 108.3,64.2 107.9,63.9 107.4,63.7 106.9,63.5 106.4,63.4 105.8,63.4
  Top Layer region: 74.4,87.1 74.4,86.6 74.3,86 74.1,85.5 73.9,85 73.6,84.6 73.3,84.2 72.9,83.8 72.5,83.5 72,83.2 71.6,83 71,82.8 70.5,82.7 70,82.7 67.8,82.7 67.3,82.7 66.7,82.8 66.2,83 65.7,83.2 65.3,83.5 64.9,83.8 64.5,84.2 64.2,84.6 63.9,85 63.7,85.5 63.5,86 63.4,86.6 63.4,87.1 63.4,105.8 63.4,106.4 63.5,106.9 63.7,107.4 63.9,107.9 64.2,108.3 64.5,108.7 64.9,109.1 65.3,109.5 65.7,109.7 66.2,109.9 66.7,110.1 67.3,110.2 67.8,110.2 70,110.2 70.5,110.2 71,110.1 71.6,109.9 72,109.7 72.5,109.5 72.9,109.1 73.3,108.7 73.6,108.3 73.9,107.9 74.1,107.4 74.3,106.9 74.4,106.4 74.4,105.8
  Top Layer region: 54.7,87.1 54.7,86.6 54.6,86 54.4,85.5 54.2,85 53.9,84.6 53.6,84.2 53.2,83.8 52.8,83.5 52.4,83.2 51.9,83 51.4,82.8 50.8,82.7 50.3,82.7 48.1,82.7 47.6,82.7 47,82.8 46.5,83 46.1,83.2 45.6,83.5 45.2,83.8 44.8,84.2 44.5,84.6 44.2,85 44,85.5 43.8,86 43.7,86.6 43.7,87.1 43.7,105.8 43.7,106.4 43.8,106.9 44,107.4 44.2,107.9 44.5,108.3 44.8,108.7 45.2,109.1 45.6,109.5 46.1,109.7 46.5,109.9 47,110.1 47.6,110.2 48.1,110.2 50.3,110.2 50.8,110.2 51.4,110.1 51.9,109.9 52.4,109.7 52.8,109.5 53.2,109.1 53.6,108.7 53.9,108.3 54.2,107.9 54.4,107.4 54.6,106.9 54.7,106.4 54.7,105.8
  Top Layer region: 35,87.1 35,86.6 34.9,86 34.7,85.5 34.5,85 34.3,84.6 33.9,84.2 33.5,83.8 33.1,83.5 32.7,83.2 32.2,83 31.7,82.8 31.2,82.7 30.6,82.7 28.4,82.7 27.9,82.7 27.4,82.8 26.9,83 26.4,83.2 25.9,83.5 25.5,83.8 25.1,84.2 24.8,84.6 24.5,85 24.3,85.5 24.1,86 24,86.6 24,87.1 24,105.8 24,106.4 24.1,106.9 24.3,107.4 24.5,107.9 24.8,108.3 25.1,108.7 25.5,109.1 25.9,109.5 26.4,109.7 26.9,109.9 27.4,110.1 27.9,110.2 28.4,110.2 30.6,110.2 31.2,110.2 31.7,110.1 32.2,109.9 32.7,109.7 33.1,109.5 33.5,109.1 33.9,108.7 34.3,108.3 34.5,107.9 34.7,107.4 34.9,106.9 35,106.4 35,105.8
  Top Layer region: 15.3,87.1 15.3,86.6 15.2,86 15.1,85.5 14.8,85 14.6,84.6 14.2,84.2 13.9,83.8 13.4,83.5 13,83.2 12.5,83 12,82.8 11.5,82.7 10.9,82.7 8.7,82.7 8.2,82.7 7.7,82.8 7.2,83 6.7,83.2 6.2,83.5 5.8,83.8 5.4,84.2 5.1,84.6 4.8,85 4.6,85.5 4.5,86 4.4,86.6 4.3,87.1 4.3,105.8 4.4,106.4 4.5,106.9 4.6,107.4 4.8,107.9 5.1,108.3 5.4,108.7 5.8,109.1 6.2,109.5 6.7,109.7 7.2,109.9 7.7,110.1 8.2,110.2 8.7,110.2 10.9,110.2 11.5,110.2 12,110.1 12.5,109.9 13,109.7 13.4,109.5 13.9,109.1 14.2,108.7 14.6,108.3 14.8,107.9 15.1,107.4 15.2,106.9 15.3,106.4 15.3,105.8
  Top Layer region: -4.3,87.1 -4.4,86.6 -4.5,86 -4.6,85.5 -4.8,85 -5.1,84.6 -5.4,84.2 -5.8,83.8 -6.2,83.5 -6.7,83.2 -7.2,83 -7.7,82.8 -8.2,82.7 -8.7,82.7 -11,82.7 -11.5,82.7 -12,82.8 -12.5,83 -13,83.2 -13.5,83.5 -13.9,83.8 -14.3,84.2 -14.6,84.6 -14.9,85 -15.1,85.5 -15.2,86 -15.3,86.6 -15.4,87.1 -15.4,105.8 -15.3,106.4 -15.2,106.9 -15.1,107.4 -14.9,107.9 -14.6,108.3 -14.3,108.7 -13.9,109.1 -13.5,109.5 -13,109.7 -12.5,109.9 -12,110.1 -11.5,110.2 -11,110.2 -8.7,110.2 -8.2,110.2 -7.7,110.1 -7.2,109.9 -6.7,109.7 -6.2,109.5 -5.8,109.1 -5.4,108.7 -5.1,108.3 -4.8,107.9 -4.6,107.4 -4.5,106.9 -4.4,106.4 -4.3,105.8
  Top Layer region: -24,87.1 -24.1,86.6 -24.2,86 -24.3,85.5 -24.5,85 -24.8,84.6 -25.1,84.2 -25.5,83.8 -25.9,83.5 -26.4,83.2 -26.9,83 -27.4,82.8 -27.9,82.7 -28.4,82.7 -30.6,82.7 -31.2,82.7 -31.7,82.8 -32.2,83 -32.7,83.2 -33.1,83.5 -33.6,83.8 -33.9,84.2 -34.3,84.6 -34.5,85 -34.8,85.5 -34.9,86 -35,86.6 -35,87.1 -35,105.8 -35,106.4 -34.9,106.9 -34.8,107.4 -34.5,107.9 -34.3,108.3 -33.9,108.7 -33.6,109.1 -33.1,109.5 -32.7,109.7 -32.2,109.9 -31.7,110.1 -31.2,110.2 -30.6,110.2 -28.4,110.2 -27.9,110.2 -27.4,110.1 -26.9,109.9 -26.4,109.7 -25.9,109.5 -25.5,109.1 -25.1,108.7 -24.8,108.3 -24.5,107.9 -24.3,107.4 -24.2,106.9 -24.1,106.4 -24,105.8
  Top Layer region: -43.7,87.1 -43.7,86.6 -43.8,86 -44,85.5 -44.2,85 -44.5,84.6 -44.8,84.2 -45.2,83.8 -45.6,83.5 -46.1,83.2 -46.6,83 -47.1,82.8 -47.6,82.7 -48.1,82.7 -50.3,82.7 -50.9,82.7 -51.4,82.8 -51.9,83 -52.4,83.2 -52.8,83.5 -53.2,83.8 -53.6,84.2 -54,84.6 -54.2,85 -54.4,85.5 -54.6,86 -54.7,86.6 -54.7,87.1 -54.7,105.8 -54.7,106.4 -54.6,106.9 -54.4,107.4 -54.2,107.9 -54,108.3 -53.6,108.7 -53.2,109.1 -52.8,109.5 -52.4,109.7 -51.9,109.9 -51.4,110.1 -50.9,110.2 -50.3,110.2 -48.1,110.2 -47.6,110.2 -47.1,110.1 -46.6,109.9 -46.1,109.7 -45.6,109.5 -45.2,109.1 -44.8,108.7 -44.5,108.3 -44.2,107.9 -44,107.4 -43.8,106.9 -43.7,106.4 -43.7,105.8
  Top Layer region: -63.4,87.1 -63.4,86.6 -63.5,86 -63.7,85.5 -63.9,85 -64.2,84.6 -64.5,84.2 -64.9,83.8 -65.3,83.5 -65.8,83.2 -66.2,83 -66.7,82.8 -67.3,82.7 -67.8,82.7 -70,82.7 -70.5,82.7 -71.1,82.8 -71.6,83 -72.1,83.2 -72.5,83.5 -72.9,83.8 -73.3,84.2 -73.6,84.6 -73.9,85 -74.1,85.5 -74.3,86 -74.4,86.6 -74.4,87.1 -74.4,105.8 -74.4,106.4 -74.3,106.9 -74.1,107.4 -73.9,107.9 -73.6,108.3 -73.3,108.7 -72.9,109.1 -72.5,109.5 -72.1,109.7 -71.6,109.9 -71.1,110.1 -70.5,110.2 -70,110.2 -67.8,110.2 -67.3,110.2 -66.7,110.1 -66.2,109.9 -65.8,109.7 -65.3,109.5 -64.9,109.1 -64.5,108.7 -64.2,108.3 -63.9,107.9 -63.7,107.4 -63.5,106.9 -63.4,106.4 -63.4,105.8
  Top Layer region: 64,-54.5 64,-55.6 63.8,-56.7 63.4,-57.9 62.9,-58.9 62.3,-59.9 61.6,-60.8 60.8,-61.6 59.9,-62.4 58.9,-63 57.8,-63.4 56.7,-63.8 55.6,-64 54.4,-64.1 -54.5,-64.1 -55.6,-64 -56.8,-63.8 -57.9,-63.4 -58.9,-63 -59.9,-62.4 -60.8,-61.6 -61.6,-60.8 -62.4,-59.9 -63,-58.9 -63.4,-57.9 -63.8,-56.7 -64,-55.6 -64.1,-54.5 -64.1,54.4 -64,55.6 -63.8,56.7 -63.4,57.9 -63,58.9 -62.4,59.9 -61.6,60.8 -60.8,61.6 -59.9,62.4 -58.9,63 -57.9,63.4 -56.8,63.8 -55.6,64 -54.5,64.1 54.4,64.1 55.6,64 56.7,63.8 57.8,63.4 58.9,63 59.9,62.4 60.8,61.6 61.6,60.8 62.3,59.9 62.9,58.9 63.4,57.9 63.8,56.7 64,55.6 64,54.4
  silkscreen extent -98,-98 98,98
MSOP08 [mil]
  round 0 smd: 1(-38.43,-83.19) 2(-12.84,-83.19) 3(12.75,-83.19) 4(38.34,-83.19) 5(38.34,83.15) 6(12.75,83.15) 7(-12.84,83.15) 8(-38.43,83.15)
  Top Layer region: -44.3,106.8 -32.5,106.8 -32.5,59.5 -44.3,59.5
  Top Layer region: -18.7,106.8 -6.9,106.8 -6.9,59.5 -18.7,59.5
  Top Layer region: 6.8,106.8 18.7,106.8 18.7,59.5 6.8,59.5
  Top Layer region: 32.4,106.8 44.2,106.8 44.2,59.5 32.4,59.5
  Top Layer region: 32.4,-59.6 44.2,-59.6 44.2,-106.8 32.4,-106.8
  Top Layer region: 6.8,-59.6 18.7,-59.6 18.7,-106.8 6.8,-106.8
  Top Layer region: -18.7,-59.6 -6.9,-59.6 -6.9,-106.8 -18.7,-106.8
  Top Layer region: -44.3,-59.6 -32.5,-59.6 -32.5,-106.8 -44.3,-106.8
  silkscreen extent -64,-64 64,64
PANASONIC_D [mm]
  rect 3x1.4 smd: +(2.4,0) -(-2.4,0)
  silkscreen extent -3.25,-3.25 3.25,3.25
PN61729 [mil]
  round 0 hole 37.4 slot 37.6 at 0 deg: 1(49.2,185.4) 2(-49.2,185.4) 3(-49.2,106.7) 4(49.2,106.7)
  round 126.61 hole 86.62: P$1(-236.2,0) P$2(236.2,0)
  Top Layer region: 79.7,198.1 61.8,215.9 36.6,215.9 18.7,198.1 18.7,172.8 36.6,154.9 61.8,154.9 79.7,172.8
  Top Layer region: -18.7,198.1 -36.6,215.9 -61.8,215.9 -79.7,198.1 -79.7,172.8 -61.8,154.9 -36.6,154.9 -18.7,172.8
  Top Layer region: -18.7,119.3 -36.6,137.2 -61.8,137.2 -79.7,119.3 -79.7,94.1 -61.8,76.2 -36.6,76.2 -18.7,94.1
  Top Layer region: 79.7,119.3 61.8,137.2 36.6,137.2 18.7,119.3 18.7,94.1 36.6,76.2 61.8,76.2 79.7,94.1
  Bottom Layer region: 79.7,198.1 61.8,215.9 36.6,215.9 18.7,198.1 18.7,172.8 36.6,154.9 61.8,154.9 79.7,172.8
  Bottom Layer region: -18.7,198.1 -36.6,215.9 -61.8,215.9 -79.7,198.1 -79.7,172.8 -61.8,154.9 -36.6,154.9 -18.7,172.8
  Bottom Layer region: -18.7,119.3 -36.6,137.2 -61.8,137.2 -79.7,119.3 -79.7,94.1 -61.8,76.2 -36.6,76.2 -18.7,94.1
  Bottom Layer region: 79.7,119.3 61.8,137.2 36.6,137.2 18.7,119.3 18.7,94.1 36.6,76.2 61.8,76.2 79.7,94.1
  silkscreen extent -232,-400 232,221
POWERSUPPLY_DC-21MM [mil]
  round 0 hole 51.18 slot 51.38 at 90 deg: 1(-200,-132)
  round 0 hole 51.18 slot 51.38 at 0 deg: 2(-3,-250) 3(-3,-14)
  round 76.77 hole 51.18 slot 51.38 at 0 deg: 4(-200,-162) 5(-200,-102) 6(-33,-14) 7(27,-14) 8(-33,-250) 9(27,-250)
  Top Layer region: -230.1,-59.3 -272.8,-101.9 -272.8,-162.1 -230.1,-204.8 -169.9,-204.8 -127.3,-162.1 -127.3,-101.9 -169.9,-59.3
  Top Layer region: 69.7,-219.9 27.1,-177.3 -33.1,-177.3 -75.8,-219.9 -75.8,-280.1 -33.1,-322.8 27.1,-322.8 69.7,-280.1
  Top Layer region: 69.7,16.1 27.1,58.7 -33.1,58.7 -75.8,16.1 -75.8,-44.1 -33.1,-86.8 27.1,-86.8 69.7,-44.1
  Bottom Layer region: -230.1,-59.3 -272.8,-101.9 -272.8,-162.1 -230.1,-204.8 -169.9,-204.8 -127.3,-162.1 -127.3,-101.9 -169.9,-59.3
  Bottom Layer region: 69.7,-219.9 27.1,-177.3 -33.1,-177.3 -75.8,-219.9 -75.8,-280.1 -33.1,-322.8 27.1,-322.8 69.7,-280.1
  Bottom Layer region: 69.7,16.1 27.1,58.7 -33.1,58.7 -75.8,16.1 -75.8,-44.1 -33.1,-86.8 27.1,-86.8 69.7,-44.1
  silkscreen extent -200,-250 154,281
QS [mil]
  round 0 hole 33.46 slot 33.66 at 90 deg: 1(-100,0) 2(100,0)
  Top Layer region: -112.6,30.5 -130.5,12.6 -130.5,-12.6 -112.6,-30.5 -87.4,-30.5 -69.5,-12.6 -69.5,12.6 -87.4,30.5
  Top Layer region: 87.4,30.5 69.5,12.6 69.5,-12.6 87.4,-30.5 112.6,-30.5 130.5,-12.6 130.5,12.6 112.6,30.5
  Bottom Layer region: -112.6,30.5 -130.5,12.6 -130.5,-12.6 -112.6,-30.5 -87.4,-30.5 -69.5,-12.6 -69.5,12.6 -87.4,30.5
  Bottom Layer region: 87.4,30.5 69.5,12.6 69.5,-12.6 87.4,-30.5 112.6,-30.5 130.5,-12.6 130.5,12.6 112.6,30.5
  silkscreen extent -225,-90 225,90
R0603-ROUND [mil]
  round 0 smd: 1(-35,0) 2(35,0)
  Top Layer region: -52.7,7.5 -52.6,9.2 -52.3,10.9 -51.8,12.5 -51.1,14.1 -50.2,15.5 -49.1,16.9 -47.9,18.1 -46.6,19.1 -45.1,20 -43.6,20.7 -41.9,21.2 -40.2,21.5 -38.5,21.6 -31.5,21.6 -29.8,21.5 -28.1,21.2 -26.4,20.7 -24.9,20 -23.4,19.1 -22.1,18.1 -20.9,16.9 -19.8,15.5 -18.9,14.1 -18.2,12.5 -17.7,10.9 -17.4,9.2 -17.3,7.5 -17.3,-7.5 -17.4,-9.2 -17.7,-10.9 -18.2,-12.5 -18.9,-14.1 -19.8,-15.5 -20.9,-16.9 -22.1,-18.1 -23.4,-19.2 -24.9,-20 -26.4,-20.7 -28.1,-21.2 -29.8,-21.6 -31.5,-21.7 -38.5,-21.7 -40.2,-21.6 -41.9,-21.2 -43.6,-20.7 -45.1,-20 -46.6,-19.2 -47.9,-18.1 -49.1,-16.9 -50.2,-15.5 -51.1,-14.1 -51.8,-12.5 -52.3,-10.9 -52.6,-9.2 -52.7,-7.5
  Top Layer region: 17.3,7.5 17.4,9.2 17.7,10.9 18.2,12.5 18.9,14.1 19.8,15.5 20.9,16.9 22.1,18.1 23.4,19.1 24.9,20 26.4,20.7 28.1,21.2 29.8,21.5 31.5,21.6 38.5,21.6 40.2,21.5 41.9,21.2 43.6,20.7 45.1,20 46.6,19.1 47.9,18.1 49.1,16.9 50.2,15.5 51.1,14.1 51.8,12.5 52.3,10.9 52.6,9.2 52.7,7.5 52.7,-7.5 52.6,-9.2 52.3,-10.9 51.8,-12.5 51.1,-14.1 50.2,-15.5 49.1,-16.9 47.9,-18.1 46.6,-19.2 45.1,-20 43.6,-20.7 41.9,-21.2 40.2,-21.6 38.5,-21.7 31.5,-21.7 29.8,-21.6 28.1,-21.2 26.4,-20.7 24.9,-20 23.4,-19.2 22.1,-18.1 20.9,-16.9 19.8,-15.5 18.9,-14.1 18.2,-12.5 17.7,-10.9 17.4,-9.2 17.3,-7.5
RESONATOR [mm]
  rect 0.7x2 smd: 1(-1,0) 2(0,0) 3(1,0)
  silkscreen extent -1.6,-0.8 1.6,0.8
SJ [mil]
  round 0 smd: 1(-30,0) 2(30,0)
  Top Layer region: -53,-31.5 -7,-31.5 -7,31.5 -53,31.5
  Top Layer region: 7,-31.5 53,-31.5 53,31.5 7,31.5
  silkscreen extent -65,-40 65,40
SMB [mil]
  rect 94.49x94.49 smd: A(86.62,0) C(-86.61,0)
  silkscreen extent -89,-75 89,75
SOT23-DBV [mil]
  round 0 smd: 1(-37.4,-51.18) 2(0,-51.18) 3(37.4,-51.18) 4(37.4,51.18) 5(-37.4,51.18)
  Top Layer region: -48.2,-27.6 -26.6,-27.6 -26.6,-74.8 -48.2,-74.8
  Top Layer region: -10.8,-27.6 10.8,-27.6 10.8,-74.8 -10.8,-74.8
  Top Layer region: 26.6,-27.6 48.2,-27.6 48.2,-74.8 26.6,-74.8
  Top Layer region: 26.6,74.8 48.2,74.8 48.2,27.6 26.6,27.6
  Top Layer region: -48.2,74.8 -26.6,74.8 -26.6,27.6 -48.2,27.6
  silkscreen extent -56,-32 56,32
SOT223 [mil]
  round 0 smd: 1(-91,-122) 2(0,-122) 3(91,-122)
  rect 141.73x86.61 smd: 4(0,122.01)
  Top Layer region: -115,-78 -67,-78 -67,-166 -115,-166
  Top Layer region: -24,-78 24,-78 24,-166 -24,-166
  Top Layer region: 67,-78 115,-78 115,-166 67,-166
  silkscreen extent -129,-70 129,70
SOT-23 [mil]
  round 0 smd: 1(1,-40) 2(-37,40) 3(39,40)
  Top Layer region: 23.5,57.5 54.5,57.5 54.5,22.5 23.5,22.5
  Top Layer region: -52.5,57.5 -21.5,57.5 -21.5,22.5 -52.5,22.5
  Top Layer region: -14.5,-22.5 16.5,-22.5 16.5,-57.5 -14.5,-57.5
  silkscreen extent -56,-15 58,15
TS42 [mil]
  round 0 smd: 1(-165.35,88.58) 2(165.35,88.58) 3(-165.35,-88.59) 4(165.35,-88.59) 5(-165.35,0)
  Top Layer region: -196.8,112 -196.8,112.5 -196.7,113 -196.6,113.5 -196.4,113.9 -196.1,114.3 -195.8,114.7 -195.5,115.1 -195.1,115.4 -194.6,115.7 -194.2,115.9 -193.7,116 -193.2,116.1 -192.7,116.1 -138,116.1 -137.5,116.1 -137,116 -136.5,115.9 -136.1,115.7 -135.6,115.4 -135.2,115.1 -134.9,114.7 -134.6,114.3 -134.3,113.9 -134.1,113.5 -134,113 -133.9,112.5 -133.9,112 -133.9,65.1 -133.9,64.7 -134,64.2 -134.1,63.7 -134.3,63.2 -134.6,62.8 -134.9,62.4 -135.2,62.1 -135.6,61.7 -136.1,61.5 -136.5,61.3 -137,61.1 -137.5,61 -138,61 -192.7,61 -193.2,61 -193.7,61.1 -194.2,61.3 -194.6,61.5 -195.1,61.7 -195.5,62.1 -195.8,62.4 -196.1,62.8 -196.4,63.2 -196.6,63.7 -196.7,64.2 -196.8,64.7 -196.8,65.1
  Top Layer region: 133.9,112 133.9,112.5 134,113 134.1,113.5 134.3,113.9 134.6,114.3 134.9,114.7 135.3,115.1 135.6,115.4 136.1,115.7 136.5,115.9 137,116 137.5,116.1 138,116.1 192.7,116.1 193.2,116.1 193.7,116 194.2,115.9 194.6,115.7 195.1,115.4 195.5,115.1 195.8,114.7 196.1,114.3 196.4,113.9 196.6,113.5 196.7,113 196.8,112.5 196.9,112 196.9,65.1 196.8,64.7 196.7,64.2 196.6,63.7 196.4,63.2 196.1,62.8 195.8,62.4 195.5,62.1 195.1,61.7 194.6,61.5 194.2,61.3 193.7,61.1 193.2,61 192.7,61 138,61 137.5,61 137,61.1 136.5,61.3 136.1,61.5 135.6,61.7 135.3,62.1 134.9,62.4 134.6,62.8 134.3,63.2 134.1,63.7 134,64.2 133.9,64.7 133.9,65.1
  Top Layer region: -196.8,-65.2 -196.8,-64.7 -196.7,-64.2 -196.6,-63.7 -196.4,-63.2 -196.1,-62.8 -195.8,-62.4 -195.5,-62.1 -195.1,-61.8 -194.6,-61.5 -194.2,-61.3 -193.7,-61.2 -193.2,-61.1 -192.7,-61 -138,-61 -137.5,-61.1 -137,-61.2 -136.5,-61.3 -136.1,-61.5 -135.6,-61.8 -135.2,-62.1 -134.9,-62.4 -134.6,-62.8 -134.3,-63.2 -134.1,-63.7 -134,-64.2 -133.9,-64.7 -133.9,-65.2 -133.9,-112 -133.9,-112.5 -134,-113 -134.1,-113.5 -134.3,-113.9 -134.6,-114.4 -134.9,-114.8 -135.2,-115.1 -135.6,-115.4 -136.1,-115.7 -136.5,-115.9 -137,-116 -137.5,-116.1 -138,-116.2 -192.7,-116.2 -193.2,-116.1 -193.7,-116 -194.2,-115.9 -194.6,-115.7 -195.1,-115.4 -195.5,-115.1 -195.8,-114.8 -196.1,-114.4 -196.4,-113.9 -196.6,-113.5 -196.7,-113 -196.8,-112.5 -196.8,-112
  Top Layer region: 133.9,-65.2 133.9,-64.7 134,-64.2 134.1,-63.7 134.3,-63.2 134.6,-62.8 134.9,-62.4 135.3,-62.1 135.6,-61.8 136.1,-61.5 136.5,-61.3 137,-61.2 137.5,-61.1 138,-61 192.7,-61 193.2,-61.1 193.7,-61.2 194.2,-61.3 194.6,-61.5 195.1,-61.8 195.5,-62.1 195.8,-62.4 196.1,-62.8 196.4,-63.2 196.6,-63.7 196.7,-64.2 196.8,-64.7 196.9,-65.2 196.9,-112 196.8,-112.5 196.7,-113 196.6,-113.5 196.4,-113.9 196.1,-114.4 195.8,-114.8 195.5,-115.1 195.1,-115.4 194.6,-115.7 194.2,-115.9 193.7,-116 193.2,-116.1 192.7,-116.2 138,-116.2 137.5,-116.1 137,-116 136.5,-115.9 136.1,-115.7 135.6,-115.4 135.3,-115.1 134.9,-114.8 134.6,-114.4 134.3,-113.9 134.1,-113.5 134,-113 133.9,-112.5 133.9,-112
  Top Layer region: -196.8,23.4 -196.8,23.9 -196.7,24.4 -196.6,24.9 -196.4,25.3 -196.1,25.8 -195.8,26.2 -195.5,26.5 -195.1,26.8 -194.6,27.1 -194.2,27.3 -193.7,27.4 -193.2,27.5 -192.7,27.6 -138,27.6 -137.5,27.5 -137,27.4 -136.5,27.3 -136.1,27.1 -135.6,26.8 -135.2,26.5 -134.9,26.2 -134.6,25.8 -134.3,25.3 -134.1,24.9 -134,24.4 -133.9,23.9 -133.9,23.4 -133.9,-23.4 -133.9,-23.9 -134,-24.4 -134.1,-24.9 -134.3,-25.4 -134.6,-25.8 -134.9,-26.2 -135.2,-26.5 -135.6,-26.8 -136.1,-27.1 -136.5,-27.3 -137,-27.4 -137.5,-27.5 -138,-27.6 -192.7,-27.6 -193.2,-27.5 -193.7,-27.4 -194.2,-27.3 -194.6,-27.1 -195.1,-26.8 -195.5,-26.5 -195.8,-26.2 -196.1,-25.8 -196.4,-25.4 -196.6,-24.9 -196.7,-24.4 -196.8,-23.9 -196.8,-23.4
  silkscreen extent -122,-87 112,87

## Free pads (board coordinates)
  round 125.98 hole 125.98 unplated: ""(2850,2500) ""(2900,4400) ""(4899.99,2700) ""(4899.99,3800)

## Via types
v1: diameter 44, hole 24, Top Layer to Bottom Layer, tented both sides, 72 vias